# EAGLE board pc386ram-nobuf.1 (EAGLE 7.7.0)
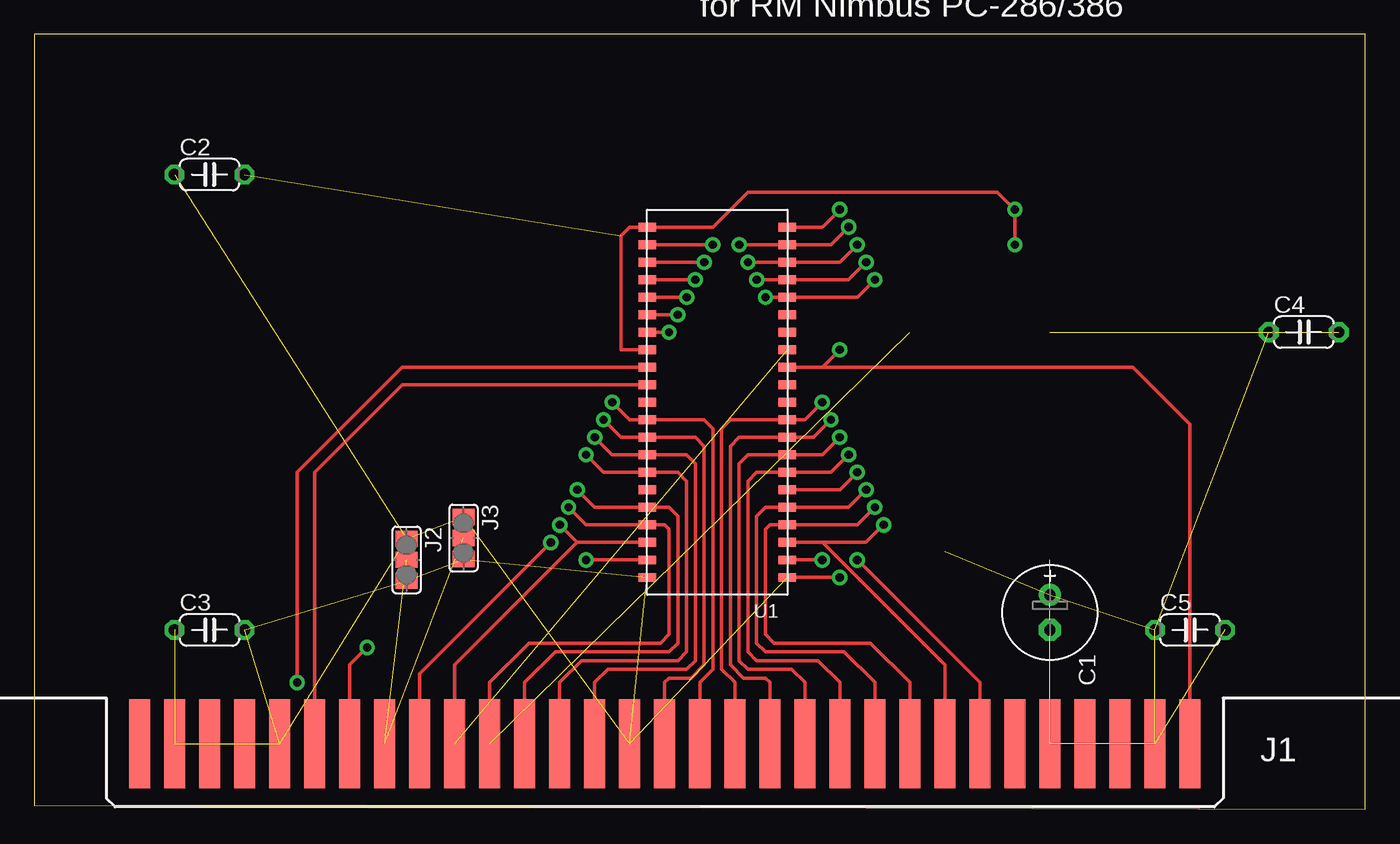
[diagram p0: board, top side]
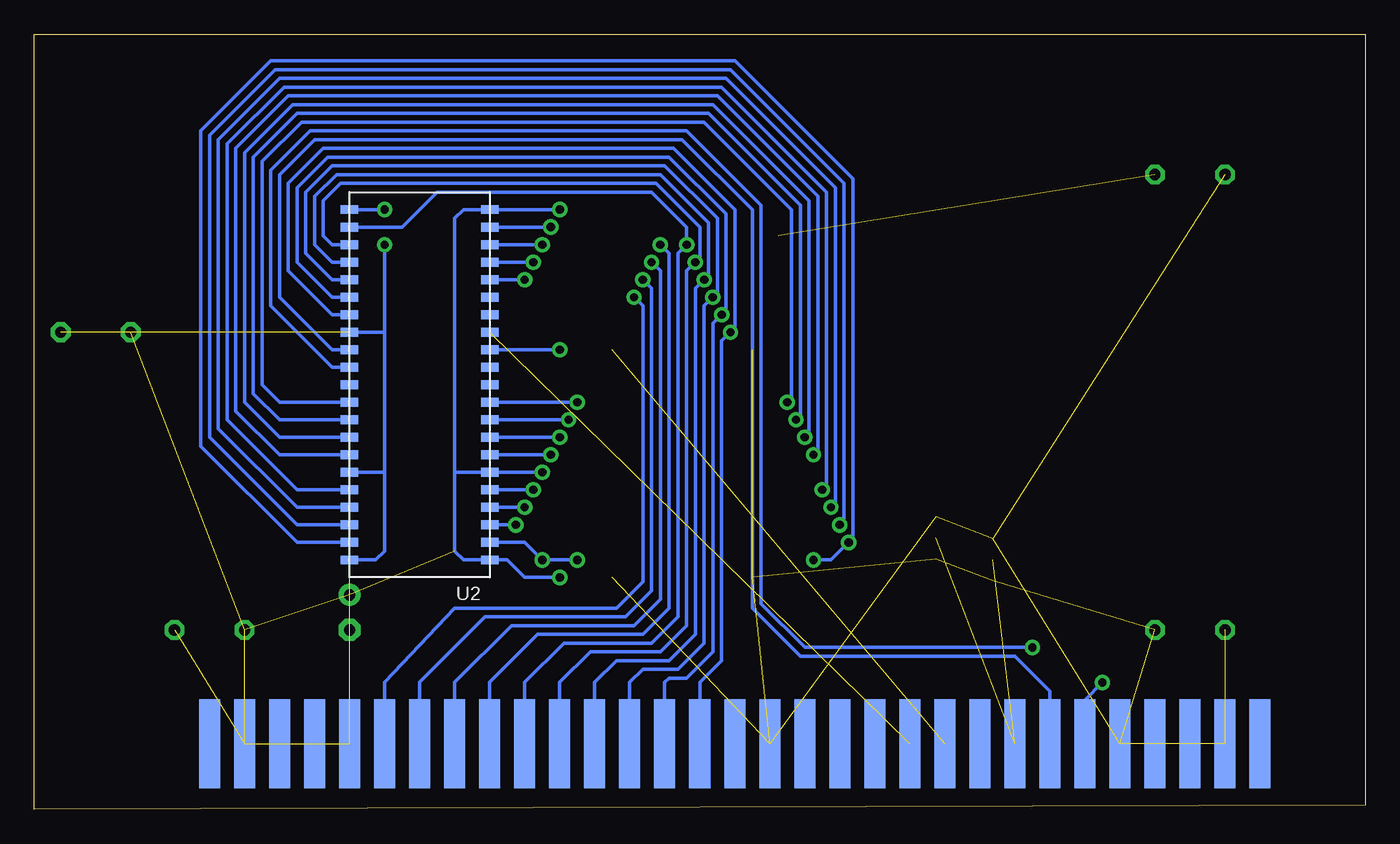
[diagram p1: board, bottom side, seen from below]

Size 96.52 x 56.2 mm. Coordinates in mm from the lower left corner, seen from the top.
Outline: 0,0.32 96.52,0 96.52,56.2 0,56.2 0,0.32
Copper layers (1*16): Top 0.035mm / dielectric 1.5mm / Bottom 0.035mm
Design rules "SparkFun": minimum track width 8mil, minimum drill 20mil, track to track 8mil, track to pad 8mil, pad to pad 8mil, via to via 8mil, smd to smd 8mil, copper to edge 10mil, drill to drill 8mil, minimum pad ring 12mil, minimum via ring 10mil, stop-mask expansion 4mil, vias tented up to drill 25mil, thermal gap 10mil

## Footprints (pad centres in the part's own frame; a part is rotated, then mirrored left to right if it is on the bottom)
E2,5-7 = drill 0.813 pad 1.6: + -1.27,0 | drill 0.813 pad 1.6 octagon: - 1.27,0
C050-024X044 = drill 0.813 octagon: 1 -2.54,0; 2 2.54,0
IBM8BIT = smd 1.524 x 6.477: A1 -25.4,5.08; A2 -27.94,5.08; A3 -30.48,5.08; A4 -33.02,5.08; A5 -35.56,5.08; A6 -38.1,5.08; A7 -40.64,5.08; A8 -43.18,5.08; A9 -45.72,5.08; A10 -48.26,5.08; A11 -50.8,5.08; A12 -53.34,5.08; A13 -55.88,5.08; A14 -58.42,5.08; A15 -60.96,5.08; A16 -63.5,5.08; A17 -66.04,5.08; A18 -68.58,5.08; A19 -71.12,5.08; A20 -73.66,5.08; A21 -76.2,5.08; A22 -78.74,5.08; A23 -81.28,5.08; A24 -83.82,5.08; A25 -86.36,5.08; A26 -88.9,5.08; A27 -91.44,5.08; A28 -93.98,5.08; A29 -96.52,5.08; A30 -99.06,5.08; A31 -101.6,5.08 | smd 1.524 x 6.477 bottom: B1 -25.4,5.08; B2 -27.94,5.08; B3 -30.48,5.08; B4 -33.02,5.08; B5 -35.56,5.08; B6 -38.1,5.08; B7 -40.64,5.08; B8 -43.18,5.08; B9 -45.72,5.08; B10 -48.26,5.08; B11 -50.8,5.08; B12 -53.34,5.08; B13 -55.88,5.08; B14 -58.42,5.08; B15 -60.96,5.08; B16 -63.5,5.08; B17 -66.04,5.08; B18 -68.58,5.08; B19 -71.12,5.08; B20 -73.66,5.08; B21 -76.2,5.08; B22 -78.74,5.08; B23 -81.28,5.08; B24 -83.82,5.08; B25 -86.36,5.08; B26 -88.9,5.08; B27 -91.44,5.08; B28 -93.98,5.08; B29 -96.52,5.08; B30 -99.06,5.08; B31 -101.6,5.08
SJ_2 = smd 1.168 x 1.6: 1 -1.524,0; 2 0,0; 3 1.524,0
SOJ-42 = smd 1.27 x 0.635: 1 0,25.4; 2 0,24.13; 3 0,22.86; 4 0,21.59; 5 0,20.32; 6 0,19.05; 7 0,17.78; 8 0,16.51; 9 0,15.24; 10 0,13.97; 11 0,12.7; 12 0,11.43; 13 0,10.16; 14 0,8.89; 15 0,7.62; 16 0,6.35; 17 0,5.08; 18 0,3.81; 19 0,2.54; 20 0,1.27; 21 0,0; 22 10.16,0; 23 10.16,1.27; 24 10.16,2.54; 25 10.16,3.81; 26 10.16,5.08; 27 10.16,6.35; 28 10.16,7.62; 29 10.16,8.89; 30 10.16,10.16; 31 10.16,11.43; 32 10.16,12.7; 33 10.16,13.97; 34 10.16,15.24; 35 10.16,16.51; 36 10.16,17.78; 37 10.16,19.05; 38 10.16,20.32; 39 10.16,21.59; 40 10.16,22.86; 41 10.16,24.13; 42 10.16,25.4

## Placement (x,y rotation side)
C1  33uF  [E2,5-7]  73.66,14.29 270 top
C2  0.1uF  [C050-024X044]  12.7,46.04 0 top
C3  0.1uF  [C050-024X044]  12.7,13.02 0 top
C4  0.1uF  [C050-024X044]  92.08,34.61 0 top
C5  0.1uF  [C050-024X044]  83.82,13.02 0 top
J1  PC-386 RAM slot  [IBM8BIT]  109.22,-0.32 0 top
J2  SELA  [SJ_2]  26.99,18.1 270 top
J3  SELB  [SJ_2]  31.11,19.68 270 top
U1  HYB5118160BSJ-70  [SOJ-42]  54.61,42.23 180 top
U2  HYB5118160BSJ-70  [SOJ-42]  63.5,43.5 180 bottom

## Library data of the parts
C1-C5 = rcl
J1 = con-pc
J2 J3 = jumper
U1 U2 = pc386ram

## Nets
!CAS0: J1.B26 U1.30
!CAS1: J1.A26 U1.31
!CAS2: J1.B25 U2.30
!CAS3: J1.A25 U2.31
!RAS0: J1.B22 U1.14
!RAS1: J1.B21 U2.14
!WE: J1.A1 U1.13 U2.13
A0: J1.B6 U1.17 U2.17
A1: J1.B7 U1.18 U2.18
A2: J1.B8 U1.19 U2.19
A3: J1.B9 U1.20 U2.20
A4: J1.B10 U1.23 U2.23
A5: J1.B11 U1.24 U2.24
A6: J1.B12 U1.25 U2.25
A7: J1.B13 U1.26 U2.26
A8: J1.B14 U1.27 U2.27
A9: J1.B15 U1.28 U2.28
D0: J1.A7 U1.2 U2.2
D1: J1.A8 U1.3 U2.3
D2: J1.A9 U1.4 U2.4
D3: J1.A10 U1.5 U2.5
D4: J1.A11 U1.7 U2.7
D5: J1.A12 U1.8 U2.8
D6: J1.A13 U1.9 U2.9
D7: J1.A14 U1.10 U2.10
D8: J1.A15 U1.33 U2.33
D9: J1.A16 U1.34 U2.34
D10: J1.A18 U1.35 U2.35
D11: J1.A19 U1.36 U2.36
D12: J1.A20 U1.38 U2.38
D13: J1.A21 U1.39 U2.39
D14: J1.A22 U1.40 U2.40
D15: J1.A23 U1.41 U2.41
GND [power]: C1.- C2.2 C3.2 C4.2 C5.2 J1.A2 J1.A5 J1.A17 J1.A27 J1.A30 J1.B5 J2.3 J3.3 U1.22 U1.29 U1.37 U1.42 U2.22 U2.29 U2.37 U2.42
SELA: J1.A24 J2.2
SELB: J1.B24 J3.2
VCC [power]: C1.+ C2.1 C3.1 C4.1 C5.1 J1.B2 J1.B17 J1.B27 J1.B30 J2.1 J3.1 U1.1 U1.6 U1.21 U2.1 U2.6 U2.21

## Tracks (layer width: path | path; a pad name or v marks a point on that pad's centre or on a via)
!CAS0  (via drill 0.6)
  Top 0.254: U1.30 26.67,32.07 19.05,24.45 v19.05,9.21
  Bottom 0.254: v19.05,9.21 20.32,7.94 J1.B26
!CAS1
  Top 0.254: U1.31 26.67,30.8 20.32,24.45 J1.A26
!CAS2
  Bottom 0.254: U2.30 74.93,33.34 78.74,37.15 78.74,46.04 76.2,48.58 49.53,48.58 44.45,43.5 44.45,14.6 40.96,11.11 25.4,11.11 22.86,8.57 J1.B25
!CAS3  (via drill 0.6)
  Top 0.254: v24.13,11.75 22.86,10.48 J1.A25
  Bottom 0.254: U2.31 74.93,32.07 79.38,36.51 79.38,46.36 76.52,49.21 49.21,49.21 43.81,43.82 43.81,14.92 40.64,11.75 v24.13,11.75
!RAS0  (1 unrouted)
!RAS1  (1 unrouted)
!WE  (via drill 0.6)
  Top 0.254: U1.13 57.15,32.07 | 57.15,32.07 79.69,32.07 83.82,27.94 J1.A1 | v58.42,33.34 57.15,32.07
  Bottom 0.254: U2.13 v58.42,33.34
A0  (via drill 0.6)
  Top 0.254: v53.02,37.15 U1.17 59.69,37.15 v60.96,38.42
  Bottom 0.254: J1.B6 71.12,9.21 66.04,14.6 54.29,14.6 52.39,16.51 52.39,36.51 v53.02,37.15 | v60.96,38.42 U2.17
A1  (via drill 0.6)
  Top 0.254: v52.39,38.42 U1.18 59.05,38.42 v60.33,39.69
  Bottom 0.254: J1.B7 68.58,9.21 63.82,13.97 53.66,13.97 51.75,15.87 51.75,37.78 v52.39,38.42 | v60.33,39.69 U2.18
A2  (via drill 0.6)
  Top 0.254: v51.75,39.69 U1.19 58.42,39.69 v59.69,40.96
  Bottom 0.254: J1.B8 66.04,9.21 61.91,13.34 53.02,13.34 51.12,15.24 51.12,39.05 v51.75,39.69 | v59.69,40.96 U2.19
A3  (via drill 0.6)
  Top 0.254: v51.12,40.96 U1.20 57.78,40.96 v59.05,42.23
  Bottom 0.254: J1.B9 63.5,9.21 60.01,12.7 52.39,12.7 50.48,14.6 50.48,40.32 v51.12,40.96 | v59.05,42.23 U2.20
A4  (via drill 0.6)
  Top 0.254: U1.23 v49.21,40.96
  Bottom 0.254: J1.B10 60.96,9.21 58.1,12.07 51.75,12.07 49.85,13.97 49.85,40.32 v49.21,40.96 49.21,42.23 51.75,44.77 67.31,44.77 69.85,42.23 U2.23
A5  (via drill 0.6)
  Top 0.254: U1.24 v48.58,39.69
  Bottom 0.254: J1.B11 58.42,9.21 56.2,11.43 51.12,11.43 49.21,13.34 49.21,39.05 v48.58,39.69 48.26,40.01 48.26,42.23 51.44,45.4 74.3,45.4 75.56,44.13 75.56,41.59 74.93,40.96 U2.24
A6  (via drill 0.6)
  Top 0.254: U1.25 v47.94,38.42
  Bottom 0.254: J1.B12 55.88,9.21 54.29,10.79 50.48,10.79 48.58,12.7 48.58,37.78 v47.94,38.42 47.62,38.73 47.62,42.54 51.12,46.04 74.61,46.04 76.2,44.45 76.2,40.96 74.93,39.69 U2.25
A7  (via drill 0.6)
  Top 0.254: U1.26 v47.31,37.15
  Bottom 0.254: J1.B13 53.34,9.21 52.39,10.16 49.85,10.16 47.94,12.07 47.94,36.51 v47.31,37.15 46.99,37.47 46.99,42.86 50.8,46.67 74.93,46.67 76.83,44.77 76.83,40.32 74.93,38.42 U2.26
A8  (via drill 0.6)
  Top 0.254: U1.27 v46.67,35.88
  Bottom 0.254: J1.B14 50.8,9.21 50.48,9.52 49.21,9.52 47.31,11.43 47.31,35.24 v46.67,35.88 46.35,36.19 46.35,43.18 50.48,47.31 75.25,47.31 77.47,45.08 77.47,39.69 74.93,37.15 U2.27
A9  (via drill 0.6)
  Top 0.254: U1.28 v46.04,34.61
  Bottom 0.254: J1.B15 48.26,9.21 46.67,10.79 46.67,33.97 v46.04,34.61 45.72,34.93 45.72,43.5 50.16,47.94 75.56,47.94 78.11,45.4 78.11,39.05 74.93,35.88 U2.28
D0  (via drill 0.6)
  Top 0.254: J1.A7 68.58,9.21 v59.69,18.1 | U1.2 v57.15,18.1
  Bottom 0.254: v57.15,18.1 v59.69,18.1 60.96,19.37 U2.2
D1  (via drill 0.6)
  Top 0.254: U1.3 57.15,19.37 | 57.15,19.37 66.04,10.48 J1.A8 | 57.15,19.37 60.33,19.37 v61.59,20.64
  Bottom 0.254: v61.59,20.64 U2.3
D2  (via drill 0.6)
  Top 0.254: J1.A9 63.5,9.21 60.64,12.07 53.66,12.07 53.02,12.7 53.02,20.32 53.34,20.64 U1.4 59.69,20.64 v60.96,21.91
  Bottom 0.254: v60.96,21.91 U2.4
D3  (via drill 0.6)
  Top 0.254: J1.A10 60.96,9.21 58.74,11.43 53.02,11.43 52.39,12.07 52.39,21.27 53.02,21.91 U1.5 59.05,21.91 v60.33,23.18
  Bottom 0.254: v60.33,23.18 U2.5
D4  (via drill 0.6)
  Top 0.254: J1.A11 58.42,9.21 56.83,10.79 52.39,10.79 51.75,11.43 51.75,23.81 52.39,24.45 U1.7 57.78,24.45 v59.05,25.72
  Bottom 0.254: v59.05,25.72 U2.7
D5  (via drill 0.6)
  Top 0.254: J1.A12 55.88,9.21 54.93,10.16 51.75,10.16 51.12,10.79 51.12,25.08 51.75,25.72 U1.8 57.15,25.72 v58.42,26.99
  Bottom 0.254: v58.42,26.99 U2.8
D6  (via drill 0.6)
  Top 0.254: J1.A13 53.34,9.21 53.02,9.52 51.44,9.52 50.48,10.48 50.48,26.35 51.12,26.99 U1.9 56.52,26.99 v57.78,28.26
  Bottom 0.254: v57.78,28.26 U2.9
D7  (via drill 0.6)
  Top 0.254: J1.A14 50.8,9.21 49.85,10.16 49.85,27.62 50.48,28.26 U1.10 55.88,28.26 v57.15,29.53
  Bottom 0.254: v57.15,29.53 U2.10
D8  (via drill 0.6)
  Top 0.254: J1.A15 48.26,9.21 49.21,10.16 49.21,27.62 48.58,28.26 U1.33 43.18,28.26 v41.91,29.53
  Bottom 0.254: U2.33 78.74,29.53 80.01,30.8 80.01,46.99 77.15,49.85 47.94,49.85 41.59,43.5 41.59,29.84 v41.91,29.53
D9  (via drill 0.6)
  Top 0.254: J1.A16 45.72,9.21 46.04,9.52 47.62,9.52 48.58,10.48 48.58,26.35 47.94,26.99 U1.34 42.55,26.99 v41.27,28.26
  Bottom 0.254: U2.34 78.74,28.26 80.64,30.16 80.64,47.31 77.47,50.48 47.62,50.48 40.96,43.82 40.96,28.58 v41.27,28.26
D10  (via drill 0.6)
  Top 0.254: J1.A18 40.64,9.21 41.59,10.16 47.31,10.16 47.94,10.79 47.94,25.08 47.31,25.72 U1.35 41.91,25.72 v40.64,26.99
  Bottom 0.254: U2.35 78.74,26.99 81.28,29.53 81.28,47.62 77.79,51.12 47.31,51.12 40.32,44.13 40.32,27.31 v40.64,26.99
D11  (via drill 0.6)
  Top 0.254: J1.A19 38.1,9.21 39.69,10.79 46.67,10.79 47.31,11.43 47.31,23.81 46.67,24.45 U1.36 41.27,24.45 v40.01,25.72
  Bottom 0.254: U2.36 78.74,25.72 81.92,28.89 81.92,47.94 78.11,51.75 46.99,51.75 39.69,44.45 39.69,26.04 v40.01,25.72
D12  (via drill 0.6)
  Top 0.254: J1.A20 35.56,9.21 37.78,11.43 46.04,11.43 46.67,12.07 46.67,21.27 46.04,21.91 U1.38 40.64,21.91 v39.37,23.18
  Bottom 0.254: U2.38 77.47,23.18 82.55,28.26 82.55,48.26 78.42,52.39 46.67,52.39 39.05,44.77 39.05,23.49 v39.37,23.18
D13  (via drill 0.6)
  Top 0.254: J1.A21 33.02,9.21 35.88,12.07 45.4,12.07 46.04,12.7 46.04,20.32 45.72,20.64 U1.39 40.01,20.64 v38.73,21.91
  Bottom 0.254: U2.39 77.47,21.91 83.19,27.62 83.19,48.58 78.74,53.02 46.35,53.02 38.42,45.08 38.42,22.22 v38.73,21.91
D14  (via drill 0.6)
  Top 0.254: U1.40 39.37,19.37 | 39.37,19.37 30.48,10.48 J1.A22 | v38.1,20.64 39.37,19.37
  Bottom 0.254: U2.40 77.47,20.64 83.82,26.99 83.82,48.9 79.06,53.66 46.04,53.66 37.78,45.4 37.78,20.95 v38.1,20.64
D15  (via drill 0.6)
  Top 0.254: J1.A23 27.94,9.84 v37.47,19.37 | v40.01,18.1 U1.41
  Bottom 0.254: v40.01,18.1 38.73,18.1 v37.47,19.37 37.15,19.68 37.15,45.72 45.72,54.29 79.38,54.29 84.45,49.21 84.45,26.35 77.47,19.37 U2.41
GND  (via drill 0.6)  (15 unrouted)
  Top 0.254: v71.12,40.96 v71.12,43.5 69.85,44.77 51.75,44.77 49.21,42.23 U1.22 43.18,42.23 42.55,41.59 42.55,33.34 U1.29
  Bottom 0.254: U2.42 71.75,18.1 71.12,18.73 71.12,24.45 | 71.12,24.45 71.12,34.61 | 71.12,34.61 v71.12,40.96 | U2.37 71.12,24.45 | U2.29 71.12,34.61 | v71.12,43.5 U2.22
SELA  (1 unrouted)
SELB  (1 unrouted)
VCC  (via drill 0.6)  (11 unrouted)
  Top 0.254: U1.21 57.15,42.23 v58.42,43.5 | U1.6 58.42,23.18 v59.69,24.45 | v58.42,16.83 U1.1
  Bottom 0.254: v58.42,43.5 U2.21 65.41,43.5 66.04,42.86 66.04,24.45 | v59.69,24.45 U2.6 66.04,24.45 | v58.42,16.83 60.96,16.83 62.23,18.1 U2.1 65.41,18.1 66.04,18.73 66.04,24.45

## Text on the board
tNames: 4MB RAM module / for RM Nimbus PC-286/386